# EAGLE board PROYECTOO (EAGLE 9.6.2)

Size 160 x 100 mm. Coordinates in mm from the lower left corner, seen from the top.
Outline: 0,0 160,0 160,100 0,100 0,0
Copper layers (1*16): Top 0.035mm / dielectric 1.5mm / Bottom 0.035mm
Design rules "default": minimum track width 6mil, minimum drill 0.35mm, track to track 6mil, track to pad 6mil, pad to pad 6mil, via to via 6mil, smd to smd 6mil, copper to edge 40mil, drill to drill 6mil, minimum pad ring 10mil, minimum via ring 8mil, stop-mask expansion 4mil, vias tented up to drill 0mil, thermal gap 10mil

## Footprints (pad centres in the part's own frame; a part is rotated, then mirrored left to right if it is on the bottom)
C0402K = smd 0.925 x 0.74: 1 -0.6,0; 2 0.6,0
C2.5-2 = drill 0.813 pad 1.6 octagon: 1 -1.27,0; 2 1.27,0
C2.5-3 = drill 0.813 pad 1.6 octagon: 1 -1.27,0; 2 1.27,0
AB9V = drill 1.118 pad 3.15 octagon: + 0,2.54; - 0,-2.54
SOIC127P600X175-8N = smd 1.525 x 0.65: 1 -2.712,1.905; 2 -2.712,0.635; 3 -2.712,-0.635; 4 -2.712,-1.905; 5 2.712,-1.905; 6 2.712,-0.635; 7 2.712,0.635; 8 2.712,1.905
SOT65P210X110-5N = smd 1.2 x 0.4: 1 -0.95,0.65; 2 -0.95,0; 3 -0.95,-0.65; 4 0.95,-0.65; 5 0.95,0.65
SOT150P700X180-5N = smd 1.9 x 0.9: 1 -3.05,2.25; 2 -3.05,0.75; 3 -3.05,-0.75; 4 -3.05,-2.25 | smd 1.9 x 3.2: 5 3.05,0
SOT95P270X145-5N = smd 1.4 x 0.6: 1 -1.25,0.95; 2 -1.25,0; 3 -1.25,-0.95; 4 1.25,-0.95; 5 1.25,0.95
ESP32S3WROOM1N16R8 = smd 1.5 x 0.9: 1 -8.75,5.26; 2 -8.75,3.99; 3 -8.75,2.72; 4 -8.75,1.45; 5 -8.75,0.18; 6 -8.75,-1.09; 7 -8.75,-2.36; 8 -8.75,-3.63; 9 -8.75,-4.9; 10 -8.75,-6.17; 11 -8.75,-7.44; 12 -8.75,-8.71; 13 -8.75,-9.98; 14 -8.75,-11.25; 27 8.75,-11.25; 28 8.75,-9.98; 29 8.75,-8.71; 30 8.75,-7.44; 31 8.75,-6.17; 32 8.75,-4.9; 33 8.75,-3.63; 34 8.75,-2.36; 35 8.75,-1.09; 36 8.75,0.18; 37 8.75,1.45; 38 8.75,2.72; 39 8.75,3.99; 40 8.75,5.26 | smd 0.9 x 1.5: 15 -6.985,-12.5; 16 -5.715,-12.5; 17 -4.445,-12.5; 18 -3.175,-12.5; 19 -1.905,-12.5; 20 -0.635,-12.5; 21 0.635,-12.5; 22 1.905,-12.5; 23 3.175,-12.5; 24 4.445,-12.5; 25 5.715,-12.5; 26 6.985,-12.5 | smd 0.9 x 0.9: 41 -1.5,-2.46; 42 -2.9,-1.06; 43 -2.9,-2.46; 44 -2.9,-3.86; 45 -1.5,-3.86; 46 -0.1,-3.86; 47 -0.1,-2.46; 48 -0.1,-1.06; 49 -1.5,-1.06
2049261103 = smd 0.45 x 1.2: 1 -1.3,3.225; 2 -0.65,3.225; 3 0,3.225; 4 0.65,3.225; 5 1.3,3.225 | drill 1.17 pad 1.6: MH1 -3.6,2.925; MH2 3.6,2.925 | drill 1.3 pad 1.7: MH3 -4.225,1.225; MH4 4.225,1.225 | drill 1.3 pad 1.6: MH5 -4.225,-0.525; MH6 4.225,-0.525
SJ3523SMTTR = smd 2.2 x 2.8: 1 2.4,-3.7; 3 4.4,3.7 | smd 2.8 x 2.6: 2 11.8,-3.8 | hole 1.7: 3.5,0; 10.5,0
P47F-BOTTOM = smd 2.6 x 2.6: A -2.45,0; C 2.45,0 | hole 2.3: 0,0
SOT95P280X110-5N = smd 1.25 x 0.6: 1 -1.25,0.95; 2 -1.25,0; 3 -1.25,-0.95; 4 1.25,-0.95; 5 1.25,0.95
0204V = drill 0.813 octagon: 1 -1.27,0; 2 1.27,0
SMK = smd 2.5 x 2: 1 1.524,0; 2 -1.524,0
TS18517SL160SMTTR = smd 1.7 x 1: 1 -3.15,1.9; 2 3.15,1.9; 3 -3.15,-1.9; 4 3.15,-1.9
MA04-1 = drill 1.016 long: 1 -3.81,0; 2 -1.27,0; 3 1.27,0; 4 3.81,0
EDG-01 = drill 0.813 long: 1 0,-3.81; 2 0,3.81

## Placement (x,y rotation side)
C1  1u  [C0402K]  -73.66,62.23 0 top  (outside the outline)
C2  1u  [C0402K]  -15.24,68.58 0 top  (outside the outline)
C3  10u  [C0402K]  -69.85,62.23 0 top  (outside the outline)
C4  1u  [C0402K]  -19.05,68.58 0 top  (outside the outline)
C5  1u  [C0402K]  -22.86,68.58 0 top  (outside the outline)
C6  [C2.5-2]  -54.61,62.23 0 top  (outside the outline)
C7  [C2.5-2]  -59.69,62.23 0 top  (outside the outline)
C8  [C2.5-2]  -64.77,62.23 0 top  (outside the outline)
C13  10v  [C2.5-3]  -60.96,43.18 0 top  (outside the outline)
C14  10v  [C2.5-3]  -66.04,43.18 0 top  (outside the outline)
G1  AB9V  [AB9V]  -16.51,35.56 0 top  (outside the outline)
IC1  AD8226ARZ  [SOIC127P600X175-8N]  -31.75,63.5 0 top  (outside the outline)
IC2  LMV321AIDCKR  [SOT65P210X110-5N]  -68.58,73.66 0 top  (outside the outline)
IC3  LMV321AIDCKR  [SOT65P210X110-5N]  -20.32,77.47 0 top  (outside the outline)
IC4  LP38692MP-3.3_NOPB  [SOT150P700X180-5N]  -48.26,43.18 0 top  (outside the outline)
IC6  MCP73831T-2ACI_OT  [SOT95P270X145-5N]  -34.29,68.58 0 top  (outside the outline)
IC10  ESP32-S3-WROOM-1-N16R8  [ESP32S3WROOM1N16R8]  -25.4,15.24 0 top  (outside the outline)
IC11  LMV321AIDCKR  [SOT65P210X110-5N]  -35.56,81.28 0 top  (outside the outline)
J1  204926-1103  [2049261103]  -30.48,34.29 0 top  (outside the outline)
J2  SJ-3523-SMT-TR  [SJ3523SMTTR]  -57.15,7.62 0 top  (outside the outline)
LED2  LAP4-BOTTOM  [P47F-BOTTOM]  -46.99,33.02 0 top  (outside the outline)
PS1  REF2033AIDDCR  [SOT95P280X110-5N]  -52.07,68.58 0 top  (outside the outline)
R1  1.6k  [0204V]  -30.48,50.8 0 top  (outside the outline)
R2  10K  [SMK]  -62.23,50.8 0 top  (outside the outline)
R3  1.6k  [0204V]  -35.56,50.8 0 top  (outside the outline)
R6  320k  [0204V]  -15.24,50.8 0 top  (outside the outline)
R7  320k  [0204V]  -20.32,50.8 0 top  (outside the outline)
R10  12K  [SMK]  -68.58,50.8 0 top  (outside the outline)
R11  12K  [SMK]  -16.51,57.15 0 top  (outside the outline)
R12  1k  [SMK]  -22.86,57.15 0 top  (outside the outline)
R15  220  [0204V]  -50.8,50.8 0 top  (outside the outline)
R16  2k  [0204V]  -55.88,50.8 0 top  (outside the outline)
RG  50  [SMK]  -22.86,63.5 0 top  (outside the outline)
S1  TS18-5-17-SL-160-SMT-TR  [TS18517SL160SMTTR]  -63.5,33.02 0 top  (outside the outline)
S2  TS18-5-17-SL-160-SMT-TR  [TS18517SL160SMTTR]  -25.4,43.18 0 top  (outside the outline)
SV1  [MA04-1]  -44.45,62.23 0 top  (outside the outline)
SW1  [EDG-01]  -63.5,6.35 0 top  (outside the outline)

## Library data of the parts
C1-C5 = rcl; SPICEPREFIX: C
C6-C8 C13 C14 = capacitor-wima
G1 = battery
IC1 = AD8226ARZ; DESCRIPTION: Wide Supply Range, Rail-to-Rail Output Instrumentation Amplifier; HEIGHT: 1.75mm; MANUFACTURER_NAME: Analog Devices; MANUFACTURER_PART_NUMBER: AD8226ARZ; MOUSER_PART_NUMBER: 584-AD8226ARZ; MOUSER_PRICE-STOCK: https://www.mouser.co.uk/ProductDetail/Analog-Devices/AD8226ARZ?qs=%2FtpEQrCGXCzihJADRPlhCg%3D%3D
IC2 IC3 IC11 = LMV321AIDCKR; DESCRIPTION: Single Low-Voltage, Cost-Optimized Rail-to-Rail Output Operational Amplifier; HEIGHT: 1.1mm; MANUFACTURER_NAME: Texas Instruments; MANUFACTURER_PART_NUMBER: LMV321AIDCKR; MOUSER_PART_NUMBER: 595-LMV321AIDCKR; MOUSER_PRICE-STOCK: https://www.mouser.co.uk/ProductDetail/Texas-Instruments/LMV321AIDCKR?qs=%252BEew9%252B0nqrDxZ%2F4fDfzAtQ%3D%3D
IC4 = LP38692MP-3.3_NOPB; DESCRIPTION: LP38692MP-3.3/NOPB, Low Dropout Voltage Regulator, 1A, 3.3 V +/-2.5%, 2.7 10 Vin, 5-Pin SOT-223; HEIGHT: 1.8mm; MANUFACTURER_NAME: Texas Instruments; MANUFACTURER_PART_NUMBER: LP38692MP-3.3/NOPB; MOUSER_PART_NUMBER: 926-LP38692MP3.3NOPB; MOUSER_PRICE-STOCK: https://www.mouser.co.uk/ProductDetail/Texas-Instruments/LP38692MP-3.3-NOPB?qs=1FNqv8aZn1TpKuOP2NKBdg%3D%3D
IC6 = MCP73831T-2ACI_OT; DESCRIPTION: Li-Ion Charge Controller 4.2V SOT23-5; HEIGHT: 1.45mm; MANUFACTURER_NAME: Microchip; MANUFACTURER_PART_NUMBER: MCP73831T-2ACI/OT; MOUSER_PART_NUMBER: 579-MCP73831T-2ACIOT; MOUSER_PRICE-STOCK: https://www.mouser.co.uk/ProductDetail/Microchip-Technology/MCP73831T-2ACI-OT?qs=yUQqVecv4qvbBQBGbHx0Mw%3D%3D
IC10 = ESP32-S3-WROOM-1-N16R8; DESCRIPTION: Multiprotocol Modules SMD Module, ESP32-S3R8, 3.3V, 8 MB Octal PSRAM Die, 16 MB Quad SPI Flash, PCB Antenna; HEIGHT: 3.25mm; MANUFACTURER_NAME: Espressif Systems; MANUFACTURER_PART_NUMBER: ESP32-S3-WROOM-1-N16R8; MOUSER_PART_NUMBER: 356-ESP32S3WRM1N16R8; MOUSER_PRICE-STOCK: https://www.mouser.co.uk/ProductDetail/Espressif-Systems/ESP32-S3-WROOM-1-N16R8?qs=Li%252BoUPsLEnvQc9gW6AMhZg%3D%3D
J1 = 204926-1103; DESCRIPTION: Micro-USB B Receptacle without Flange, Surface Mount, Waterproof, Lead-Free; HEIGHT: 4.65mm; MANUFACTURER_NAME: Molex; MANUFACTURER_PART_NUMBER: 204926-1103; MOUSER_PART_NUMBER: 538-204926-1103; MOUSER_PRICE-STOCK: https://www.mouser.co.uk/ProductDetail/Molex/204926-1103?qs=55YtniHzbhBOQihiQOeiLg%3D%3D
J2 = SJ-3523-SMT-TR; DESCRIPTION: 3.5 mm, Stereo, Right Angle, Surface Mount (SMT), 3 Conductors, 0 Internal Switches, Audio Jack Connector; HEIGHT: 5.2mm; MANUFACTURER_NAME: Same Sky; MANUFACTURER_PART_NUMBER: SJ-3523-SMT-TR; MOUSER_PART_NUMBER: 490-SJ-3523-SMT-TR; MOUSER_PRICE-STOCK: https://www.mouser.co.uk/ProductDetail/CUI-Devices/SJ-3523-SMT-TR?qs=WyjlAZoYn51zOHzJ3r4ZRA%3D%3D
LED2 = led
PS1 = REF2033AIDDCR; DESCRIPTION: Low-Drift, Low-Power, Dual-Output Vref and Vref/2 Voltage Reference; HEIGHT: 1.1mm; MANUFACTURER_NAME: Texas Instruments; MANUFACTURER_PART_NUMBER: REF2033AIDDCR; MOUSER_PART_NUMBER: 595-REF2033AIDDCR; MOUSER_PRICE-STOCK: https://www.mouser.co.uk/ProductDetail/Texas-Instruments/REF2033AIDDCR?qs=7z%252BmIopC6%2FKHHOBVNaL7UQ%3D%3D
R1 R3 R6 R7 R15 R16 = rcl; SPICEPREFIX: R
R2 R10-R12 RG = resistor-shunt; OC_FARNELL: unknown; OC_NEWARK: unknown
S1 S2 = TS18-5-17-SL-160-SMT-TR; DESCRIPTION: 5 x 5 mm, 1.7 mm Actuator Height, 160 gf, Silver, Surface Mount, TR, SPST, Tactile Switch; HEIGHT: 1.8mm; MANUFACTURER_NAME: Same Sky; MANUFACTURER_PART_NUMBER: TS18-5-17-SL-160-SMT-TR; MOUSER_PART_NUMBER: 179-TS18517SL160SMTT; MOUSER_PRICE-STOCK: https://www.mouser.co.uk/ProductDetail/CUI-Devices/TS18-5-17-SL-160-SMT-TR?qs=tlsG%2FOw5FFhWy38y3t272A%3D%3D
SV1 = con-lstb; OC_FARNELL: unknown; OC_NEWARK: unknown
SW1 = special

## Nets
+BATT: C13.1 G1.+ IC6.3 SW1.2
GND: C1.2 C3.2 C6.1 C7.1 C8.2 C13.2 C14.2 G1.- IC1.5 IC2.2 IC3.2 IC4.5 IC6.2 IC10.1 IC10.40 IC10.41 IC10.42 IC10.43 IC10.44 IC10.45 IC10.46 IC10.47 IC10.48 IC10.49 IC11.2 J1.5 J1.MH1 J1.MH2 J1.MH3 J1.MH4 J1.MH5 J1.MH6 PS1.2 R6.2 R16.1 S1.3 S2.1 SV1.1
N$2: IC1.1 J2.2
N$3: IC1.2 RG.1
N$4: IC1.3 RG.2
N$5: C1.1 IC2.1 R3.1
N$6: C2.1 R1.1 R3.2
N$8: C7.2 IC10.3 R10.1 S1.1
N$9: C2.2 C4.1 IC2.3 IC2.4
N$11: C4.2 C5.1 R7.2
N$12: C5.2 IC3.1 R6.1
N$13: IC3.3 IC3.4 R7.1
N$17: IC1.4 J2.3
N$19: IC4.1 IC4.4 SW1.1
N$24: IC6.1 R15.1
N$25: LED2.C R15.2
N$27: IC6.5 R16.2
N$43: C8.1 IC10.27 R11.1 S2.3
N$44: IC11.3 R2.2 R12.1
N$46: IC11.4 R2.1
OUT_1: IC1.7 R1.2
SCL: IC10.36 SV1.3
SDA: IC10.33 SV1.4
VCC: C3.1 C6.2 C14.1 IC1.8 IC2.5 IC3.5 IC4.3 IC6.4 IC10.2 IC11.5 J1.1 LED2.A PS1.3 PS1.4 R10.2 R11.2 SV1.2
VSS: IC1.6 IC11.1 PS1.1

## Tracks (layer width: path | path; a pad name or v marks a point on that pad's centre or on a via)
+BATT  (3 unrouted)
GND  (37 unrouted)
N$2  (1 unrouted)
N$3  (1 unrouted)
N$4  (1 unrouted)
N$5  (2 unrouted)
N$6  (2 unrouted)
N$8  (3 unrouted)
N$9  (3 unrouted)
N$11  (2 unrouted)
N$12  (2 unrouted)
N$13  (2 unrouted)
N$17  (1 unrouted)
N$19  (2 unrouted)
N$24  (1 unrouted)
N$25  (1 unrouted)
N$27  (1 unrouted)
N$43  (3 unrouted)
N$44  (2 unrouted)
N$46  (1 unrouted)
OUT_1  (1 unrouted)
SCL  (1 unrouted)
SDA  (1 unrouted)
VCC  (16 unrouted)
VSS  (2 unrouted)